# Altium PCB ADTPCB.PcbDoc (part 1 of 2)
Units mil, origin at the board's own origin, x right, y up, seen from the top; angles counter-clockwise.
Board outline 2950 x 1935 mil, 2 copper layers (Top Layer, Bottom Layer); 87 components, 120 nets, 430 pads, 109 vias.
Unrouted connection lines stored in the file: 3.
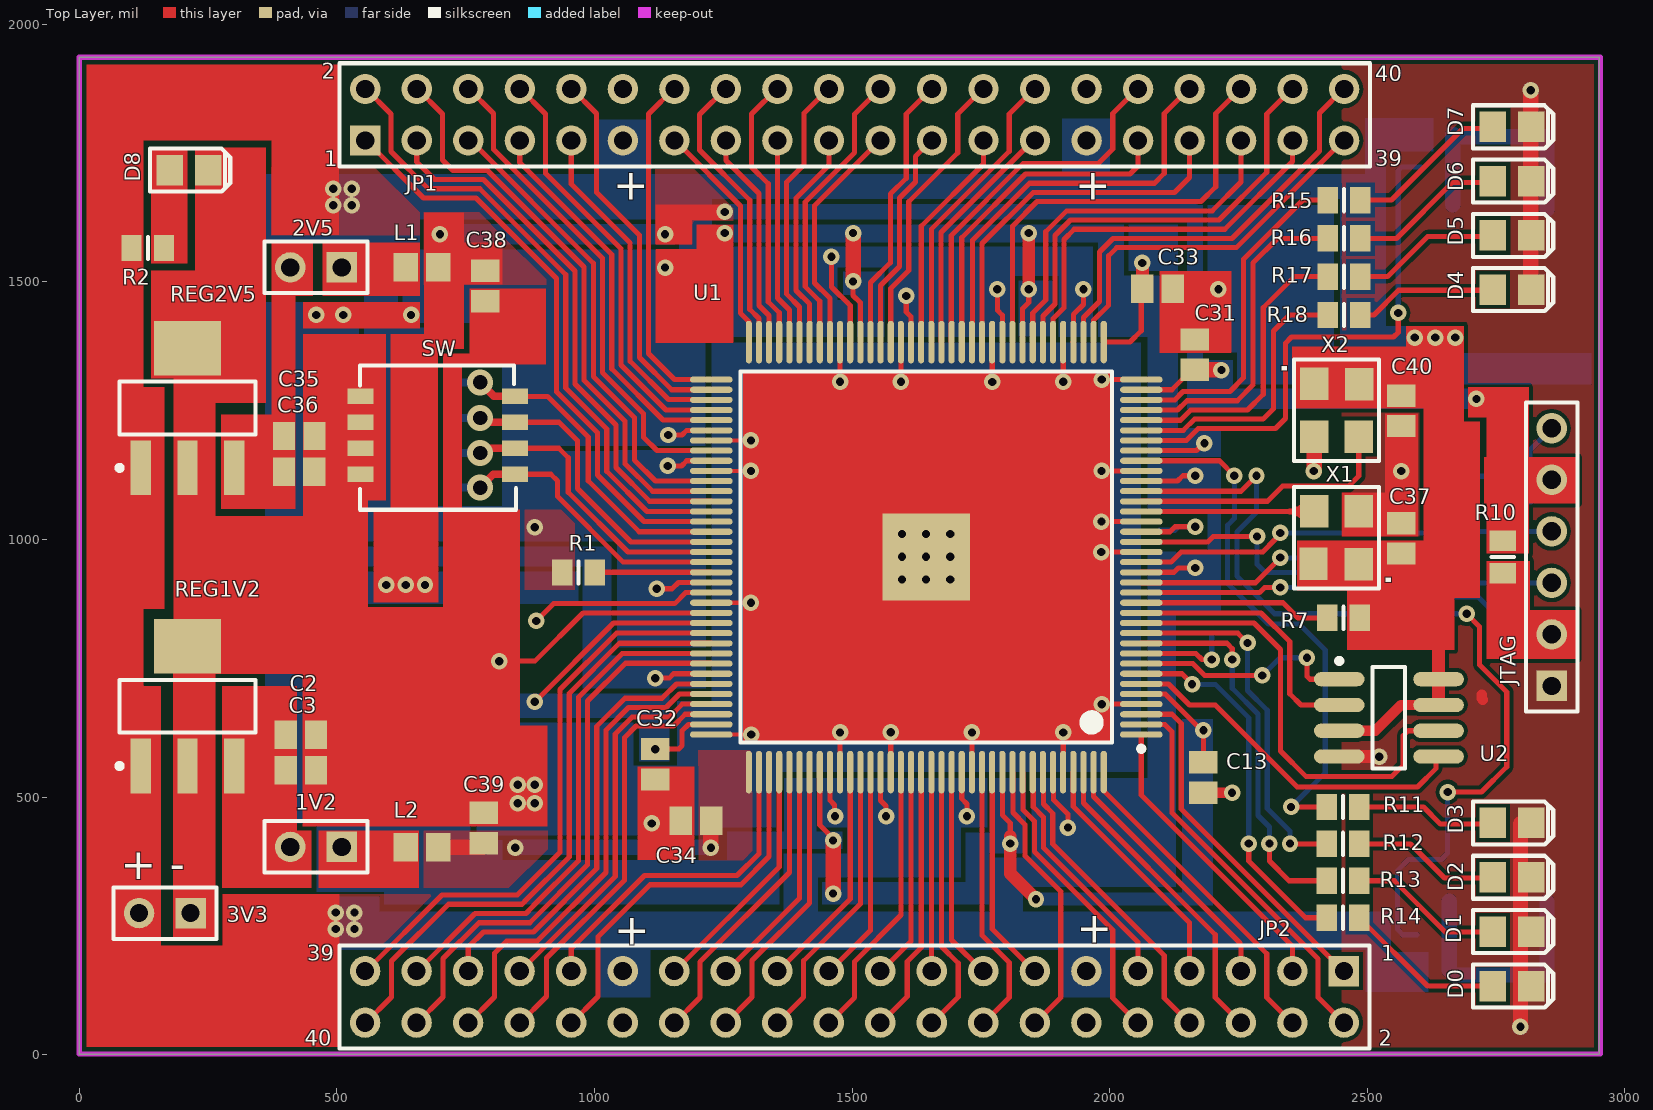
[diagram p0: Top Layer view]
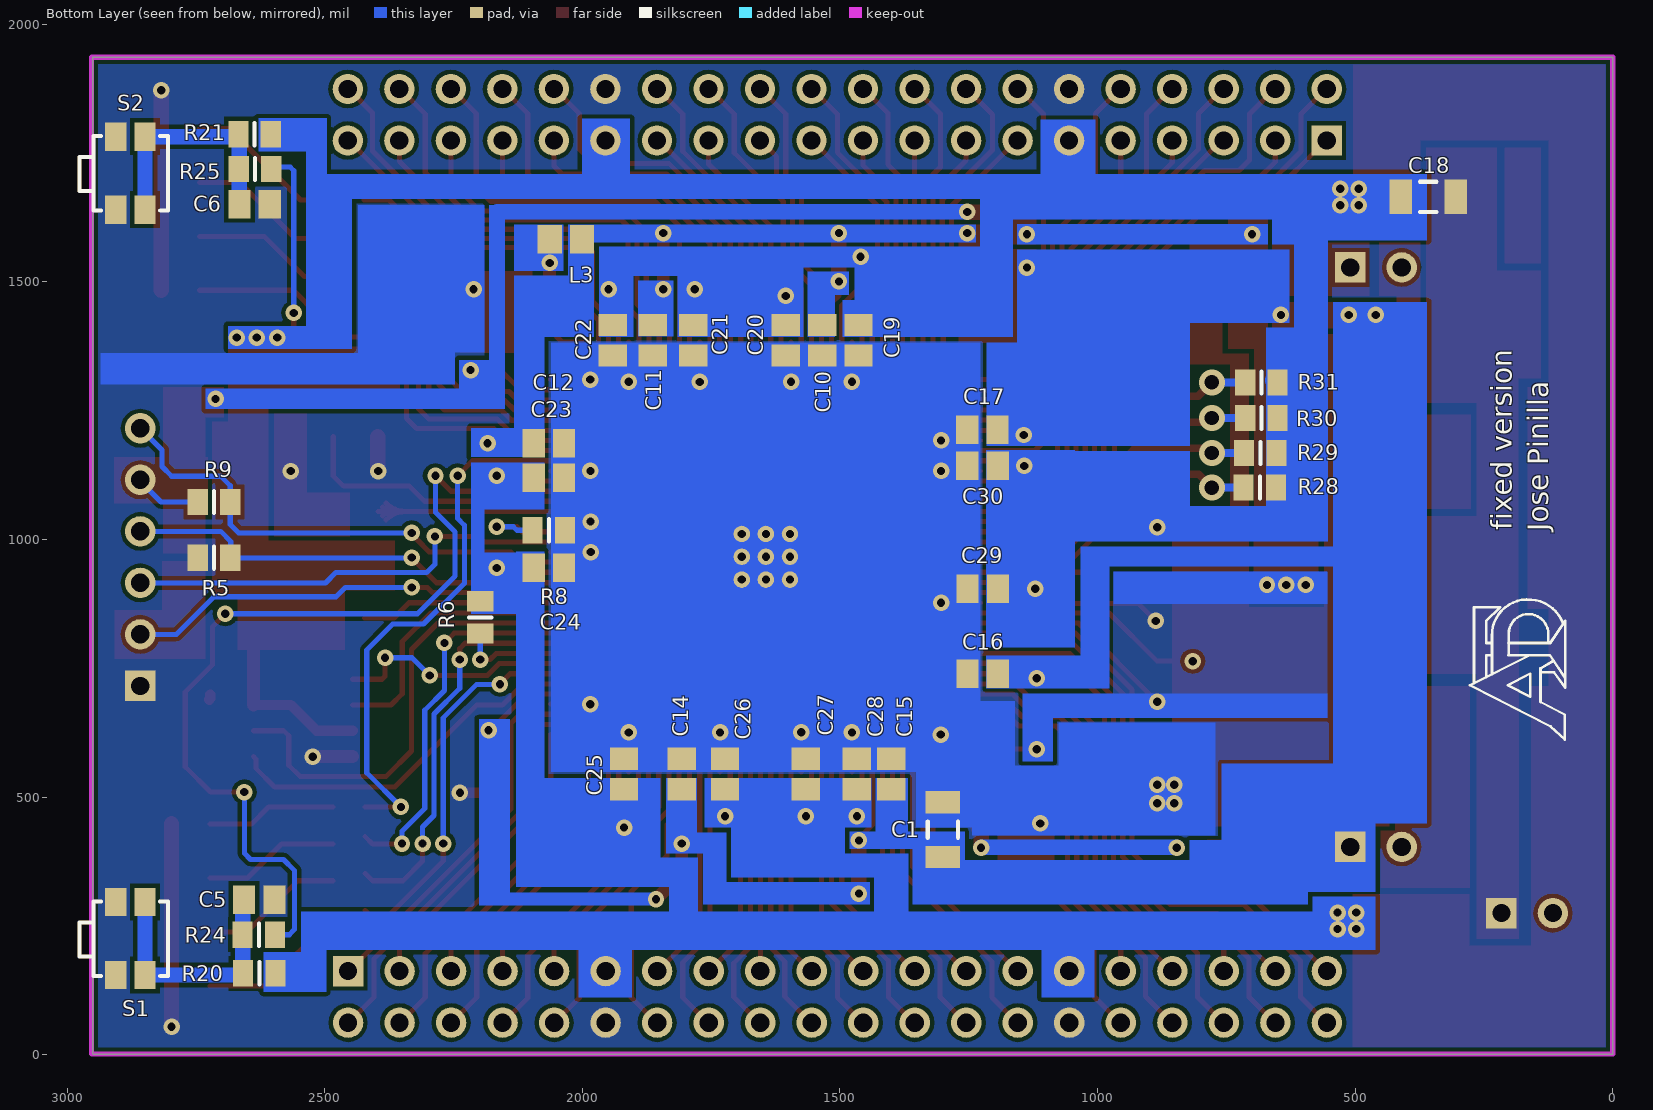
[diagram p1: Bottom Layer view, seen from below]

## Layer stack, top to bottom
Top Solder: solder mask 0.4, Solder Resist, Dk 3.5
Top Layer: signal copper 1.4
Dielectric1: core 12.6, FR-4, Dk 4.8
Bottom Layer: signal copper 1.4
Bottom Solder: solder mask 0.4, Solder Resist, Dk 3.5

## Board outline
0,0.91 0,1935.91 2950,1935.91 2950,0.91

## Design rules (kind name [scope] priority, off if disabled: settings)
Clearance [All] p1: gap=7.87 ignorepadtopadclearanceinfootprint=FALSE except(0: Arc-Hole Track-Hole SMDPad-Hole THPad-Hole Via-Hole Fill-Hole Poly-Hole Region-Hole Text-Hole)
ComponentClearance [All] p1: gap=0 collisioncheckmode=3 verticalgap=10 showdistances=FALSE
FabricationTestPointUsage TestPointUsage [All] p1: valid=0 allowmultiple=FALSE
FabricationTestpoint Testpoint [All] p1: side=3 testpointundercomponent=TRUE minsize=40 maxsize=100 preferedsize=60 minholesize=0 maxholesize=40 preferedholesize=32 testpointgrid=1 allowsidetop=TRUE allowsidebottom=TRUE usegrid=TRUE gridtolerance=0.01
PlaneConnect [All] p1: planeconnectstyle=Direct reliefexpansion=20 reliefentries=4 reliefconductorwidth=10 reliefairgap=10
PolygonConnect [All] p1: connectstyle=Direct reliefconductorwidth=10 reliefentries=4 polygonreliefangle="90 Angle" airgapwidth=10
RoutingVias [All] p1: holewidth=28 width=50 viastyle="Through Hole" minholewidth=16 minwidth=32 maxholewidth=28 maxwidth=50
SilkToSilkClearance [All] p1: silktosilkclearance=0
SilkToSolderMaskClearance SilkscreenOverComponentPads [IsPad] p1: minsilkscreentomaskgap=0 clearancetoexposedcopper=TRUE
SolderMaskExpansion [All] p1: expansion=4 istentingtop=FALSE
Width [All] p1: maxlimit=100 minlimit=7.87 preferedwidth=10 minimp=50.000000 maximp=50.000000 favimp=50.000000
24 further rules are at their usual default settings.

## Components (designator, comment, footprint, x,y, rotation, side; value= is the part's Value field where it differs from the comment)
1V2 "1V2" HDR1X2 509.53,403.31 r180 top
2V5 "2V5" HDR1X2 509.53,1528.23 r180 top
3V3 "VCC3P3" HDR1X2 216,274.91 r180 top
C1 "Cap" C1206 1300,436.91 r270 bottom
C2 "Cap" C0805 430,620.91 r180 top
C3 "Cap" C0805 430,551.91 r180 top
C5 "Cap" C0805 2627,300.91 r0 bottom
C6 "Cap" C0805 2636,1650.91 r0 bottom
C10 "Cap" C0805 1534.5,1386.91 r90 bottom
C11 "Cap" C0805 1863,1386.91 r90 bottom
C12 "Cap" C0805 2065,1186.91 r0 bottom
C13 "Cap" C0805 2182,537.91 r90 top
C14 "Cap" C0805 1807,544.91 r270 bottom
C15 "Cap" C0805 1400,544.91 r270 bottom
C16 "Cap" C0805 1223,739.53 r180 bottom
C17 "Cap" C0805 1223.6,1213.21 r180 bottom
C18 "Cap" C1206 358,1664.91 r0 bottom
C19 "Cap" C0805 1464,1386.91 r90 bottom
C20 "Cap" C0805 1605,1386.91 r90 bottom
C21 "Cap" C0805 1785,1386.91 r90 bottom
C22 "Cap" C0805 1941,1386.91 r90 bottom
C23 "Cap" C0805 2065,1119.91 r0 bottom
C24 "Cap" C0805 2065,944.91 r0 bottom
C25 "Cap" C0805 1919,544.91 r270 bottom
C26 "Cap" C0805 1723,544.91 r270 bottom
C27 "Cap" C0805 1566,544.91 r270 bottom
C28 "Cap" C0805 1467,544.91 r270 bottom
C29 "Cap" C0805 1222.7,904.61 r180 bottom
C30 "Cap" C0805 1223.28,1143.21 r180 bottom
C31 "Cap" C0805 2165,1358.91 r270 top
C32 "Cap" C0805 1118,563.91 r90 top
C33 "Cap" C0805 2093.02,1486.91 r180 top
C34 "Cap" C0805 1197,453.91 r0 top
C35 "Cap" C0805 427,1200.91 r180 top
C36 "Cap" C0805 426.73,1131.59 r180 top
C37 "Cap" C0805 2566,1002.24 r270 top
C38 "Cap" C0805 788,1491.91 r90 top
C39 "Cap" C0805 785,439.91 r270 top
C40 "Cap" C0805 2566,1249.86 r90 top
D0 "LED2" CD2012-0805 2781,132.91 r0 top
D1 "LED2" CD2012-0805 2781,238.57 r0 top
D2 "LED2" CD2012-0805 2781,344.24 r0 top
D3 "LED2" CD2012-0805 2781,449.91 r0 top
D4 "LED2" CD2012-0805 2781,1484.91 r0 top
D5 "LED2" CD2012-0805 2781,1590.24 r0 top
D6 "LED2" CD2012-0805 2781,1695.57 r0 top
D7 "LED2" CD2012-0805 2781,1800.91 r0 top
D8 "LED2" CD2012-0805 213,1716.91 r0 top
JP1 "*" HDR2X20 555.12,1774.48 r0 top
JP2 "*" HDR2X20 2454.72,162.28 r180 top
JTAG "*" HDR1X6 2858,715.91 r90 top
L1 "Ferrite Bead" 2029 665,1528.23 r0 top
L2 "Ferrite Bead" 2029 665,402.91 r0 top
L3 "Ferrite Bead" 2029 2032,1582.91 r0 bottom
R1 "Res Semi" 6-0805_L 969,935.91 r0 top
R2 "Res Semi" 6-0805_L 133,1565.91 r0 top
R5 "Res Semi" 6-0805_L 2715,964.91 r0 bottom
R6 "Res Semi" 6-0805_L 2198,848.91 r270 bottom
R7 "Res Semi" 6-0805_L 2454,847.91 r180 top
R8 "Res Semi" 6-0805_L 2065,1017.91 r0 bottom
R9 "Res Semi" 6-0805_L 2715,1072.91 r180 bottom
R10 "Res Semi" 6-0805_L 2763,965.91 r270 top
R11 "Res Semi" 6-0805_L 2453,480.91 r0 top
R12 "Res Semi" 6-0805_L 2453,409.24 r0 top
R13 "Res Semi" 6-0805_L 2453,337.57 r0 top
R14 "Res Semi" 6-0805_L 2453,265.91 r0 top
R15 "Res Semi" 6-0805_L 2455,1658.91 r0 top
R16 "Res Semi" 6-0805_L 2455,1584.57 r0 top
R17 "Res Semi" 6-0805_L 2455,1510.24 r0 top
R18 "Res Semi" 6-0805_L 2455,1435.91 r0 top
R20 "Res Semi" 6-0805_L 2627,157.91 r0 bottom
R21 "Res Semi" 6-0805_L 2636,1786.91 r0 bottom
R24 "Res Semi" 6-0805_L 2628,232.91 r0 bottom
R25 "Res Semi" 6-0805_L 2635.5,1719.21 r0 bottom
R28 "Res Semi" 6-0805_L 685,1100.91 r0 bottom
R29 "Res Semi" 6-0805_L 684,1167.91 r0 bottom
R30 "Res Semi" 6-0805_L 682,1235.91 r0 bottom
R31 "Res Semi" 6-0805_L 682,1304.91 r0 bottom
REG1V2 "RT9183-12GG" SOT223_M 210,676.54 r90 top
REG2V5 "MCP1824ST-2502E" SOT223_M 210,1255.28 r90 top
S1 "SW-PB" EVQ-P7C01K 2900,253.17 r0 bottom
S2 "SW-PB" EVQ-P7C01K 2900,1738.76 r0 bottom
SW "DIP" DIP 645,1153.91 r90 top
U1 "EP4CE6E144" EQFP144_M 1644,965.91 r180 top
U2 "*" SO8_M 2542,653.91 r0 top
X1 "OSCILLATORSMD" "OSCILLATOR SMD" 2440.16,1003.31 r90 top
X2 "OSCILLATORSMD" "OSCILLATOR SMD" 2440.16,1250.92 r270 top

## Footprints (in the part's own frame and the unit in brackets; to place one, negate y for a bottom-side part, rotate by r counter-clockwise, add the part's x,y. Pads: shape width x height; smd on the part's side, far side on the other; paste and mask are expansions set on the pad)
6-0805_L [mm] "Chip Resistor, Body 2.0x1.2mm, IPC High Density"
  rect 1x1.3 smd: 1(-0.8,0) 2(0.8,0)
  silkscreen extent 0,-0.55 0,0.55, body extent -1.07,-0.7 1.07,0.7, height 0.7
2029 [mm] "Chip Inductor, Body 2.0x1.2mm, IPC High Density"
  rect 1.2x1.4 smd: 1(-0.8,0) 2(0.8,0)
  body extent -1.1,-0.7 1.1,0.7, height 0.55
C0805 [mm] "Chip Capacitor, Body 2.0x1.3mm, IPC High Density"
  rect 1.1x1.4 smd: 1(-0.75,0) 2(0.75,0)
  body extent -1.1,-0.72 1.1,0.72, height 1.4
C1206 [mm] "Chip Capacitor, Body 3.2x1.6mm, IPC High Density"
  rect 1.1x1.7 smd: 1(-1.35,0) 2(1.35,0)
  silkscreen extent -0.4,-0.75 0.4,0.75, body extent -1.7,-0.9 1.7,0.9, height 1.3
CD2012-0805 [mm] "Chip Inductor; Body 2.0 x 1.2 mm (LxW typ)"
  rect 1.3x1.5 smd: 1(-0.95,0) 2(0.95,0)
  silkscreen extent -1.92,-1.05 2.03,1.07
DIP [mm]
  rect 0.762x1.27 smd: 1(-0.69,2.52) 2(0.59,2.52) 3(1.87,2.52) 4(3.15,2.52) 5(-0.69,-5.1) 6(0.59,-5.1) 7(1.87,-5.1) 8(3.15,-5.1)
  silkscreen extent -2.44,-5.15 4.67,2.55, body extent -2.54,-5.25 4.77,2.65, height 2.7
EQFP144_M [mm] "Thin QFP, 144-Leads, Body 20x20mm, Pitch 0.5mm, IPC Low Density"
  oval 2.1x0.3 smd: 1(-10.6,8.75) 2(-10.6,8.25) 3(-10.6,7.75) 4(-10.6,7.25) 5(-10.6,6.75) 6(-10.6,6.25) 7(-10.6,5.75) 8(-10.6,5.25) 9(-10.6,4.75) 10(-10.6,4.25) 11(-10.6,3.75) 12(-10.6,3.25) 13(-10.6,2.75) 14(-10.6,2.25) 15(-10.6,1.75) 16(-10.6,1.25) 17(-10.6,0.75) 18(-10.6,0.25) 19(-10.6,-0.25) 20(-10.6,-0.75) 21(-10.6,-1.25) 22(-10.6,-1.75) 23(-10.6,-2.25) 24(-10.6,-2.75) 25(-10.6,-3.25) 26(-10.6,-3.75) 27(-10.6,-4.25) 28(-10.6,-4.75) 29(-10.6,-5.25) 30(-10.6,-5.75) 31(-10.6,-6.25) 32(-10.6,-6.75) 33(-10.6,-7.25) 34(-10.6,-7.75) 35(-10.6,-8.25) 36(-10.6,-8.75) 73(10.6,-8.75) 74(10.6,-8.25) 75(10.6,-7.75) 76(10.6,-7.25) 77(10.6,-6.75) 78(10.6,-6.25) 79(10.6,-5.75) 80(10.6,-5.25) 81(10.6,-4.75) 82(10.6,-4.25) 83(10.6,-3.75) 84(10.6,-3.25) 85(10.6,-2.75) 86(10.6,-2.25) 87(10.6,-1.75) 88(10.6,-1.25) 89(10.6,-0.75) 90(10.6,-0.25) 91(10.6,0.25) 92(10.6,0.75) 93(10.6,1.25) 94(10.6,1.75) 95(10.6,2.25) 96(10.6,2.75) 97(10.6,3.25) 98(10.6,3.75) 99(10.6,4.25) 100(10.6,4.75) 101(10.6,5.25) 102(10.6,5.75) 103(10.6,6.25) 104(10.6,6.75) 105(10.6,7.25) 106(10.6,7.75) 107(10.6,8.25) 108(10.6,8.75)
  oval 0.3x2.1 smd: 37(-8.75,-10.6) 38(-8.25,-10.6) 39(-7.75,-10.6) 40(-7.25,-10.6) 41(-6.75,-10.6) 42(-6.25,-10.6) 43(-5.75,-10.6) 44(-5.25,-10.6) 45(-4.75,-10.6) 46(-4.25,-10.6) 47(-3.75,-10.6) 48(-3.25,-10.6) 49(-2.75,-10.6) 50(-2.25,-10.6) 51(-1.75,-10.6) 52(-1.25,-10.6) 53(-0.75,-10.6) 54(-0.25,-10.6) 55(0.25,-10.6) 56(0.75,-10.6) 57(1.25,-10.6) 58(1.75,-10.6) 59(2.25,-10.6) 60(2.75,-10.6) 61(3.25,-10.6) 62(3.75,-10.6) 63(4.25,-10.6) 64(4.75,-10.6) 65(5.25,-10.6) 66(5.75,-10.6) 67(6.25,-10.6) 68(6.75,-10.6) 69(7.25,-10.6) 70(7.75,-10.6) 71(8.25,-10.6) 72(8.75,-10.6) 109(8.75,10.6) 110(8.25,10.6) 111(7.75,10.6) 112(7.25,10.6) 113(6.75,10.6) 114(6.25,10.6) 115(5.75,10.6) 116(5.25,10.6) 117(4.75,10.6) 118(4.25,10.6) 119(3.75,10.6) 120(3.25,10.6) 121(2.75,10.6) 122(2.25,10.6) 123(1.75,10.6) 124(1.25,10.6) 125(0.75,10.6) 126(0.25,10.6) 127(-0.25,10.6) 128(-0.75,10.6) 129(-1.25,10.6) 130(-1.75,10.6) 131(-2.25,10.6) 132(-2.75,10.6) 133(-3.25,10.6) 134(-3.75,10.6) 135(-4.25,10.6) 136(-4.75,10.6) 137(-5.25,10.6) 138(-5.75,10.6) 139(-6.25,10.6) 140(-6.75,10.6) 141(-7.25,10.6) 142(-7.75,10.6) 143(-8.25,10.6) 144(-8.75,10.6)
  rect 4.3x4.3 smd: 145(0,0)
  silkscreen extent -10.73,-9.15 9.15,9.57, body extent -10,-10 10,10, height 1.6
EVQ-P7C01K [mm]
  rect 1.05x1.4 smd: 1(-1.3,-1.1) 1(-1.3,2.5) 2(0.15,-1.1) 2(0.15,2.5)
  silkscreen extent -2.44,-1.13 1.94,2.55, body extent -2.54,-1.22 1.94,2.64, height 1.2
HDR1X2 [mm] "Connector; Header; 2 Position"
  rect 1.5x1.5 hole 0.9: 1(0,0)
  round 1.5 hole 0.9: 2(2.54,0)
  silkscreen extent -1.27,-1.27 3.81,1.27
HDR1X6 [mm] "Connector; Header; 6 Position"
  rect 1.5x1.5 hole 0.9: 1(0,0)
  round 1.5 hole 0.9: 2(2.54,0) 3(5.08,0) 4(7.62,0) 5(10.16,0) 6(12.7,0)
  silkscreen extent -1.27,-1.27 13.97,1.27
HDR2X20 [mm] "Connector; Header; 20x2 Position"
  rect 1.5x1.5 hole 0.9: 1(0,0)
  round 1.5 hole 0.9: 2(0,2.54) 3(2.54,0) 4(2.54,2.54) 5(5.08,0) 6(5.08,2.54) 7(7.62,0) 8(7.62,2.54) 9(10.16,0) 10(10.16,2.54) 11(12.7,0) 12(12.7,2.54) 13(15.24,0) 14(15.24,2.54) 15(17.78,0) 16(17.78,2.54) 17(20.32,0) 18(20.32,2.54) 19(22.86,0) 20(22.86,2.54) 21(25.4,0) 22(25.4,2.54) 23(27.94,0) 24(27.94,2.54) 25(30.48,0) 26(30.48,2.54) 27(33.02,0) 28(33.02,2.54) 29(35.56,0) 30(35.56,2.54) 31(38.1,0) 32(38.1,2.54) 33(40.64,0) 34(40.64,2.54) 35(43.18,0) 36(43.18,2.54) 37(45.72,0) 38(45.72,2.54) 39(48.26,0) 40(48.26,2.54)
  silkscreen extent -1.27,-1.27 49.53,3.81
"OSCILLATOR SMD" [mm]
  rect 1.6x1.4 smd: 1(-1.3,-1.1) 2(1.3,-1.1) 3(1.3,1.1) 4(-1.273,1.129)
  silkscreen extent -2.5,-2.1 2.5,2.1, body extent -2.5,-2.1 2.5,2.1, height 1
SO8_M [mm] "SOIC, 8-Leads, Body 4.9x3.9mm, Pitch 1.27mm, IPC Low Density"
  oval 2.5x0.7 smd: 1(-2.45,1.905) 2(-2.45,0.635) 3(-2.45,-0.635) 4(-2.45,-1.905) 5(2.45,-1.905) 6(2.45,-0.635) 7(2.45,0.635) 8(2.45,1.905)
  silkscreen extent -2.57,-2.5 0.8,2.93, body extent -2,-2.5 2,2.5, height 1.75
SOT223_M [mm] "SOT223, 4-Leads, Body 6.5x3.5mm, Pitch 2.3mm, Lead Span 7mm, IPC Low Density"
  rect 2.7x1 smd: 1(-2.95,2.3) 2(-2.95,0) 3(-2.95,-2.3)
  rect 2.7x3.3 smd: 4(2.95,0)
  silkscreen extent -3.07,-3.35 1.3,3.47, body extent -1.85,-3.35 1.85,3.35, height 1.7

## Part data
1V2 2V5 3V3: library part JP1Q, "CONN HEADER 36POS .100 VERT TIN"
C1 C18: "CAP CER 100UF 6.3V Y5V 1206"
C2 C38 C39: "CAP CER 10UF 10V Y5V 0805"
C3 C10 C11 C12 C13 C14 C15 C16 C17 C19 C20 C21 C22 C23 C24 C25 C26 C27 C28 C29 C30 C31 C32 C33 C34 C36 C37 C40: "CAP CER 0.1UF 16V 10% X7R 0805"
C5 C6: "CAP CER 1UF 16V Y5V 0805"
C35: "CAP CER 0.47UF 16V 10% X7R 0805"
D0 D1 D2 D3 D4 D5 D6 D7 D8: "LED GREEN CLEAR THIN 0805 SMD"
JP1 JP2: library part JP20Q, "CONN HEADER 36POS .100 VERT TIN"
JTAG: library part JP3Q, "CONN HEADER 36POS .100 VERT TIN"
L1 L2 L3: library part Inductor, "FERRITE CHIP BEAD 600 OHM SMD"
R1 R6 R7 R8 R9 R10 R28 R29 R30 R31: "RES 10K OHM 1/8W 5% 0805 SMD"
R2 R11 R12 R13 R14 R15 R16 R17 R18: "RES 220 OHM 1/8W 5% 0805 SMD"
R5: "RES 1.0K OHM 1/8W 5% 0805 SMD"
R20 R21: "RES 100K OHM 1/8W 5% 0805 SMD"
R24 R25: "RES 2K OHM 1/8W 5% 0805 SMD"
REG1V2: "IC REG LDO 1.2V 1.5A SOT223"
REG2V5: library part RT9183-12GG, "IC REG LDO 2.5V .3A SOT223-3"
S1 S2: "SWITCH TACTILE SPST-NO 0.05A 12V"
SW: "SWITCH DIP HALF PITCH 4POS"
U2: library part M25P16, "IC FLASH 16MBIT 75MHZ 8SOIC"
X1 X2: "OSCILLATOR 50.00MHZ SMD"

## Free pads (board coordinates)
  round 32 hole 16: 0(1596.95,1010.83) 1(1643.7,1010.83) 2(1690.45,1010.83) 3(1690.45,966.54) 4(1643.7,966.54) 5(1596.95,966.54) 6(1596.95,922.24) 7(1643.7,922.24) 8(1690.45,922.24)

## Via types
v1: diameter 32, hole 16, Top Layer to Bottom Layer, 105 vias
v2: diameter 50, hole 28, Top Layer to Bottom Layer, 4 vias

## Nets (pads, with @x,y where several pads share a name; then routed paths per layer and width w, separated by ;. In a path a pad name is that pad's centre, name@x,y a point inside that pad or via, vN(x,y) a via of type N, cw(c..) or ccw(c..) an arc to the next point about the centre after c; other vN are vias at no path point)
ASDO: U1.6 U2.5 | length 695.2
  Top Layer w10: U1.6@2061.32,719.84 2114.06,719.84 2155,678.91 2204.95,678.91 2364.17,519.68 2597.44,519.68 2633.74,555.98 2633.74,574.19 U2.5@2638.46,578.91
CLK2: U1.24 X2.3 | length 518.9
  Top Layer w10: U1.24@2061.32,1074.17 2306.27,1074.17 2335.87,1103.78 2463.87,1103.78 2483.46,1123.37 X2.3@2483.46,1199.74
CLK3: R24.1 U1.25 | length 1773.9
  Top Layer w10: U1.25@2061.32,1093.86 2254.95,1093.86 v1(2285,1123.91) ; v1(2656,509.91) 2722,509.91 2770.87,558.78 2770.87,704.03 2718,756.91 2718,830.91 v1(2693,855.91)
  Bottom Layer w10: v1(2285,1123.91) 2285,1052.91 2247,1014.91 2247,928.91 2320,855.91 v1(2693,855.91) ; R24.1@2596.5,232.91 2569,232.91 2559,242.91 2559,357.91 2580,378.91 2644,378.91 2656,390.91 v1(2656,509.91)
CLK4: R28.2 SW.5 U1.91 | length 639.2
  Top Layer w10: 815.79,1126.74 915.17,1126.74 928,1113.91 928,1083.91 1055.84,956.06 U1.91@1226.68,956.06
  Top Layer w15: v2(778,1100.91) 803.83,1126.74 SW.5@845.79,1126.74
  Bottom Layer w15: R28.2@716.5,1100.91 v2(778,1100.91)
CLK5: R29.2 SW.6 U1.90 | length 667.7
  Top Layer w10: 815.79,1177.13 930.77,1177.13 949,1158.91 949,1091.91 1065.16,975.75 U1.90@1226.68,975.75
  Top Layer w15: v2(778,1167.91) 787.23,1177.13 SW.6@845.79,1177.13
  Bottom Layer w15: R29.2@715.5,1167.91 v2(778,1167.91)
CLK6: R30.2 SW.7 U1.89 | length 697.1
  Top Layer w10: 815.79,1227.53 931.38,1227.53 967,1191.91 967,1099.18 1070.75,995.43 U1.89@1226.68,995.43
  Top Layer w15: v2(778,1235.91) 786.38,1227.53 SW.7@845.79,1227.53
  Bottom Layer w15: R30.2@713.5,1235.91 v2(778,1235.91)
CLK7: R31.2 SW.8 U1.88 | length 713
  Top Layer w10: 815.79,1277.92 908.98,1277.92 988,1198.91 988,1113.91 1086.79,1015.12 U1.88@1226.68,1015.12
  Top Layer w15: v2(778,1304.91) 804.98,1277.92 SW.8@845.79,1277.92
  Bottom Layer w15: R31.2@713.5,1304.91 v2(778,1304.91)
CLK_50M: U1.23 X1.3 | length 468.7
  Top Layer w10: U1.23@2061.32,1054.49 X1.3@2396.85,1054.49 ; X1.3@2380.9,1038.54 ccw(c2342.39,1000.03) 2342.39,1054.49 ccw(c2342.39,1108.95) X1.3@2380.9,1070.44 ; X1.3@2387.97,1045.61 ccw(c2366.53,1024.17) 2366.53,1054.49 ccw(c2366.53,1084.81) X1.3@2387.97,1063.37
CONF_DONE: R1.2 U1.92 | length 226.2
  Top Layer w10: R1.2@1000.5,936.38 U1.92@1226.68,936.38
DATA0: U1.13 U2.2 | length 517.7
  Top Layer w10: U1.13@2061.32,857.64 2293.92,857.65 2349.41,802.17 2349.41,700.79 2371.29,678.91 U2.2@2445.54,678.91
DCLK: U1.12 U2.6 | length 885.9
  Top Layer w10: U1.12@2061.32,837.95 2280.16,837.95 2331.54,786.58 2331.54,589.61 2380.79,540.35 2548.23,540.35 2569.88,562.01 2569.88,619.09 2579.69,628.91 U2.6@2638.46,628.91
GND: 3V3.1 C1.1 C2.1 C3.1 C5.1 C6.1 C10.1 C11.1 C12.1 C13.1 C14.1 C15.1 C16.1 C17.1 C18.1 C19.1 C20.1 C21.1 C22.1 C23.1 C24.1 C25.1 C26.1 C27.1 C28.1 C29.1 C30.1 C31.1 C32.1 C33.1 C34.1 C35.1 C36.1 C37.1 C38.1 C39.1 C40.1 D0.2 D1.2 D2.2 D3.2 D4.2 D5.2 D6.2 D7.2 D8.2 JP1.12 JP1.30 JP2.12 JP2.30 JTAG.1 pad.0 pad.1 pad.2 pad.3 pad.4 pad.5 pad.6 pad.7 pad.8 R5.2 R8.1 REG1V2.2 REG1V2.4 REG2V5.2 REG2V5.4 S1.2 S2.2 SW.1 SW.2 SW.3 SW.4 U1.4 U1.19 U1.22 U1.27 U1.36 U1.41 U1.48 U1.57 U1.63 U1.79 U1.82 U1.95 U1.96 U1.108 U1.118 U1.123 U1.131 U1.140 U1.145 U2.4 X1.2 X2.2 | length 2974.3
  Top Layer w7.87: U1.108@1226.68,621.42 v1(1304.49,621.42) ; U1.95@1226.68,877.32 v1(1303.58,877.32) ; U1.82@1226.68,1133.23 v1(1303.68,1133.23) ; U1.79@1226.68,1192.28 v1(1303.62,1192.28)
  Top Layer w10: v1(815,763.91) 884,763.91 977.73,857.64 U1.96@1226.68,857.64 ; U1.118@1476.68,548.58 v1(1476.68,625.58) ; v1(1476.68,1306.23) U1.63@1476.68,1383.23 ; U1.123@1575.1,548.58 v1(1575.1,626.01) ; v1(1594.79,1306.12) U1.57@1594.79,1383.23 ; U1.131@1732.58,548.58 v1(1732.58,625.49) ; v1(1771.95,1305.95) U1.48@1771.95,1383.23 ; U1.140@1909.75,548.58 v1(1909.75,625.65) ; v1(1909.75,1306.16) U1.41@1909.75,1383.23 ; v1(1983.84,975.75) U1.19@2061.32,975.75 ; v1(1983.9,1034.8) U1.22@2061.32,1034.8 ; v1(1984.32,1133.23) U1.27@2061.32,1133.23 ; v1(1984.49,1310.39) U1.36@2061.32,1310.39 ; v1(1984.57,680.47) U1.4@2061.32,680.47 ; v1@2522.47,578.91 v1(2523.23,578.15)
  Top Layer w20: C13.1@2182,508.38 v1(2237.53,508.38) ; 2722.11,698.79 2722.11,691.27 2724.41,688.98
  Top Layer w25: U2.4@2445.54,578.91 v1@2522.47,578.91
  Top Layer w30: v1@2396.85,1133.76 X2.2@2396.85,1199.74 ; v1(2797.4,54.31) 2797.4,238.43 D3.2@2797.4,448.05 ; D4.2@2817.4,1483.76 v1(2817.4,1872.31)
  Top Layer w40: C3.1@459.53,551.91 C2.1@459.53,620.91 ; SW.1@545.79,1126.74 SW.2@545.79,1177.13 SW.3@545.79,1227.53 SW.4@545.79,1277.92
  other v1: 1111,448.91 851,487.91 884,487.91 851,523.91 884,523.91 2396,1132.91 2566,1132.91 2211,1485.91
IO1: JP2.3 U1.1 | length 582.2
  Top Layer w10: U1.1@2061.32,621.42 2061.32,504.03 2355,210.35 JP2.3@2355,160.91
IO2: JP2.2 U1.2 | length 769.9
  Top Layer w10: U1.2@2061.32,641.1 2106.8,641.1 2121,626.91 2121,469.63 2404.68,185.94 2404.68,111.22 JP2.2@2455,60.91
IO3: JP2.1 U1.3 | length 698
  Top Layer w10: U1.3@2061.32,660.79 2121.12,660.79 2138.87,643.03 2138.87,477.03 JP2.1@2455,160.91
IO7: R14.1 U1.7 | length 716.1
  Top Layer w10: U1.7@2061.32,739.53 2140.38,739.53 v1@2154,725.91 ; v1(2270,409.91) 2270,375.91 2380,265.91 2407.5,265.91 R14.1@2421.5,279.91
  Bottom Layer w10: v1(2160,718.91) 2205,718.91 2270,653.91 v1(2270,409.91)
IO10: R13.1 U1.10 | length 756.2
  Top Layer w10: U1.10@2061.32,798.58 2227.45,798.58 2238,788.03 v1(2238,766.91) ; v1(2310,409.91) 2310,375.91 2348.33,337.57 2407.5,337.57 R13.1@2421.5,351.57
  Bottom Layer w10: v1(2238,766.91) 2238,711.18 2287.87,661.31 2287.87,464.09 2310,441.97 v1(2310,409.91)
IO11: R12.1 U1.11 | length 715.3
  Top Layer w10: U1.11@2061.32,818.27 2248.66,818.27 v1(2267.72,799.21) ; v1@2350,409.24 2407.5,409.24 R12.1@2421.5,423.24
  Bottom Layer w10: v1(2267.72,799.21) 2267.39,798.88 2267.39,707.07 2305.75,668.71 2305.75,478.16 2350,433.91 v1(2350,409.91)
IO28: R11.1 U1.28 | length 1051.6
  Top Layer w10: U1.28@2061.32,1152.91 2212.99,1152.91 v1(2242,1123.91) ; v1(2352,480.91) R11.1@2421.5,480.91
  Bottom Layer w10: v1(2242,1123.91) 2242,1040.91 2229,1027.91 2229,914.91 2308,835.91 2368,835.91 2418.31,785.6 2418.31,547.21 v1(2352,480.91)
IO30: R25.1 U1.30 | length 1032.9
  Top Layer w10: U1.30@2061.32,1192.28 2148.54,1192.28 2172.04,1215.78 2321.87,1215.78 2341,1234.91 2341,1380.91 2353,1392.91 2551,1392.91 2560,1401.91 v1@2560,1440.91
  Bottom Layer w10: v1(2560,1439.91) 2560,1715.91 2566.87,1722.78 R25.1@2604,1722.78
IO31: R18.1 U1.31 | length 543.4
  Top Layer w10: U1.31@2061.32,1211.97 2142.95,1211.97 2164.64,1233.65 2297.75,1233.65 2318,1253.91 2318,1404.91 2349,1435.91 R18.1@2423.5,1435.91
IO32: R17.1 U1.32 | length 576
  Top Layer w10: U1.32@2061.32,1231.65 2137.36,1231.65 2157.23,1251.53 2267.62,1251.53 2298,1281.91 2298,1449.91 2358.33,1510.24 R17.1@2423.5,1510.24
IO33: R16.1 U1.33 | length 638.9
  Top Layer w10: U1.33@2061.32,1251.34 2131.77,1251.34 2149.83,1269.4 2247.5,1269.4 2277.87,1299.78 2277.87,1536.5 2325.94,1584.57 R16.1@2423.5,1584.57
IO34: R15.1 U1.34 | length 657.6
  Top Layer w10: U1.34@2061.32,1271.02 2126.17,1271.02 2142.43,1287.28 2233.37,1287.28 2260,1313.91 2260,1543.91 2375,1658.91 R15.1@2423.5,1658.91
IO38: JP1.39 U1.38 | length 730
  Top Layer w10: U1.38@1968.8,1383.23 1968.8,1425.53 1998,1454.73 1998,1550.91 2013.62,1566.53 2245.62,1566.53 JP1.39@2455,1775.91
IO39: JP1.40 U1.39 | length 837.7
  Top Layer w10: U1.39@1949.12,1383.23 1949.12,1431.13 1980.13,1462.14 1980.13,1558.31 2006.22,1584.4 2237.5,1584.4 2407,1753.91 2407,1827.91 JP1.40@2455,1875.91
IO42: JP1.37 U1.42 | length 756.3
  Top Layer w10: U1.42@1890.06,1383.23 1890.06,1428.41 1911.57,1449.92 1911.57,1582.47 1931.37,1602.28 2223.37,1602.28 2355,1733.91 JP1.37@2355,1775.91
IO43: JP1.38 U1.43 | length 862.3
  Top Layer w10: U1.43@1870.38,1383.23 1870.38,1434.01 1893.69,1457.32 1893.69,1589.88 1923.97,1620.15 2212.24,1620.15 2305,1712.91 2305,1825.91 JP1.38@2355,1875.91
IO44: JP1.35 U1.44 | length 725.7
  Top Layer w10: U1.44@1850.69,1383.23 1850.69,1439.6 1875.82,1464.72 1875.82,1597.28 1916.56,1638.02 2199.12,1638.02 2255,1693.91 JP1.35@2255,1775.91
IO46: JP1.36 U1.46 | length 862.7
  Top Layer w10: U1.46@1811.32,1383.23 1811.32,1608.23 1858.99,1655.9 2176.99,1655.9 2206,1684.91 2206,1826.91 JP1.36@2255,1875.91
IO49: JP1.33 U1.49 | length 720.2
  Top Layer w10: U1.49@1752.27,1383.23 1752.27,1574.45 1851.59,1673.77 2125.87,1673.77 2155,1702.91 JP1.33@2155,1775.91
IO50: JP1.34 U1.50 | length 809.7
  Top Layer w10: U1.50@1732.58,1383.23 1733.49,1384.13 1733.49,1580.95 1844.18,1691.65 2086.74,1691.65 2106,1710.91 2106,1826.91 JP1.34@2155,1875.91
IO51: JP1.31 U1.51 | length 664.8
  Top Layer w10: U1.51@1712.9,1383.23 1712.9,1585.64 1836.78,1709.52 2039.61,1709.52 2055,1724.91 2055,1775.91 JP1.31@2043.44,1775.91
IO52: JP1.32 U1.52 | length 728.9
  Top Layer w10: U1.52@1693.21,1383.23 1692.38,1384.06 1692.38,1590.39 1832.17,1730.19 1978.35,1730.19 2006,1757.84 2006,1826.91 JP1.32@2055,1875.91
IO53: JP1.27 U1.53 | length 482.4
  Top Layer w10: U1.53@1673.53,1383.23 1672.63,1384.13 1672.63,1595.92 1846.43,1769.72 1840.24,1775.91 JP1.27@1855,1775.91
IO54: JP1.28 U1.54 | length 576
  Top Layer w10: U1.54@1653.84,1383.23 1653.84,1602.41 1805,1753.57 1805,1825.91 JP1.28@1855,1875.91
IO55: JP1.25 U1.55 | length 442.7
  Top Layer w10: U1.55@1634.16,1383.23 1634.16,1608.01 1755,1728.85 JP1.25@1755,1775.91
IO58: JP1.26 U1.58 | length 567.2
  Top Layer w10: U1.58@1575.1,1383.23 1575.1,1487.45 1610,1522.35 1610,1655.8 1705,1750.8 1705,1825.91 JP1.26@1755,1875.91
IO59: JP1.23 U1.59 | length 433.9
  Top Layer w10: U1.59@1555.42,1383.23 1555.42,1493.05 1592.13,1529.75 1592.13,1663.21 1622.87,1693.95 1622.87,1743.78 JP1.23@1655,1775.91
IO60: JP1.24 U1.60 | length 542.1
  Top Layer w10: U1.60@1535.73,1383.23 1535.73,1498.64 1574.25,1537.16 1574.25,1670.61 1605,1701.36 1605,1825.91 JP1.24@1655,1875.91
IO64: JP1.21 U1.64 | length 458.1
  Top Layer w10: U1.64@1456.99,1383.23 1456.99,1468.13 1427,1498.13 1427,1647.91 JP1.21@1555,1775.91
IO65: JP1.22 U1.65 | length 564.9
  Top Layer w10: U1.65@1437.31,1383.23 1437.31,1462.54 1409,1490.85 1409,1655.18 1505,1751.18 1505,1825.91 JP1.22@1555,1875.91
IO66: JP1.19 U1.66 | length 430.1
  Top Layer w10: U1.66@1417.62,1383.23 1417.62,1456.95 1391.13,1483.45 1391.13,1662.59 1455,1726.46 JP1.19@1455,1775.91
IO67: JP1.20 U1.67 | length 537
  Top Layer w10: U1.67@1397.94,1383.23 1397.94,1451.36 1373,1476.29 1373,1693.91 1407,1727.91 1407,1827.91 JP1.20@1455,1875.91
IO68: JP1.17 U1.68 | length 402.3
  Top Layer w10: JP1.17@1355,1775.91 1355,1469.02 1378.25,1445.76 U1.68@1378.25,1383.23
IO69: JP1.18 U1.69 | length 535.6
  Top Layer w10: JP1.18@1355,1875.91 1305,1825.91 1305,1722.91 1337.13,1690.78 1337.13,1461.61 1358.57,1440.17 U1.69@1358.57,1383.23
IO70: JP1.15 U1.70 | length 427.4
  Top Layer w10: JP1.15@1255,1775.91 1255,1735.91 1319.25,1671.65 1319.25,1454.21 1338.88,1434.58 U1.70@1338.88,1383.23
IO71: JP1.16 U1.71 | length 561.5
  Top Layer w10: JP1.16@1255,1875.91 1204,1824.91 1204,1755.91 1301.38,1658.53 1301.38,1446.81 1319.2,1428.99 U1.71@1319.2,1383.23
IO72: JP1.13 U1.72 | length 458.1
  Top Layer w10: JP1.13@1162.38,1783.28 1160.87,1781.78 1160.87,1770.03 1283.5,1647.4 1283.5,1439.4 1299.51,1423.39 U1.72@1299.51,1383.23
IO73: JP1.14 U1.73 | length 678.3
  Top Layer w10: JP1.14@1155,1875.91 1105,1825.91 1105,1360.91 1155.51,1310.39 U1.73@1226.68,1310.39
IO74: JP1.10 U1.74 | length 742.7
  Top Layer w10: JP1.10@955,1875.91 1004,1826.91 1004,1673.91 1087.13,1590.78 1087.13,1353.5 1149.92,1290.71 U1.74@1226.68,1290.71
IO75: JP1.9 U1.75 | length 665.7
  Top Layer w10: JP1.9@955,1775.91 955,1689.91 1069.25,1575.65 1069.25,1346.1 1143.42,1271.93 1225.77,1271.93 U1.75@1226.68,1271.02
IO76: JP1.8 U1.76 | length 830
  Top Layer w10: JP1.8@855,1875.91 905,1825.91 905,1710.91 1051.38,1564.53 1051.38,1338.69 1138.73,1251.34 U1.76@1226.68,1251.34
IO77: JP1.7 U1.77 | length 753
  Top Layer w10: JP1.7@855,1775.91 855,1731.91 1033.5,1553.4 1033.5,1331.29 1133.02,1231.78 1226.55,1231.78 U1.77@1226.68,1231.65
IO80: JP1.6 U1.80 | length 960.4
  Top Layer w10: JP1.6@755,1875.91 804,1826.91 804,1757.63 1015.63,1546 1015.63,1323.89 1095.24,1244.27 1095.24,1198.66 1121.31,1172.6 U1.80@1226.68,1172.6
IO83: JP1.5 U1.83 | length 922.9
  Top Layer w10: JP1.5@755,1775.91 758.11,1775.91 997.76,1536.26 997.76,1316.48 1077.37,1236.87 1077.37,1154.65 1118.47,1113.54 U1.83@1226.68,1113.54
IO84: JP1.4 U1.84 | length 1124.7
  Top Layer w10: JP1.4@655,1875.91 705,1825.91 705,1736.91 725.38,1716.53 792.21,1716.53 979.88,1528.86 979.88,1309.08 1059.5,1229.47 1059.5,1147.24 1112.88,1093.86 U1.84@1226.68,1093.86
IO85: JP1.3 U1.85 | length 1064.4
  Top Layer w10: JP1.3@655,1775.91 655,1732.91 689.25,1698.65 784.81,1698.65 962.01,1521.45 962.01,1301.68 1041.62,1222.06 1041.62,1139.84 1107.29,1074.17 U1.85@1226.68,1074.17
IO86: JP1.2 U1.86 | length 1231.6
  Top Layer w10: JP1.2@555,1875.91 605,1825.91 605,1752.91 677.13,1680.78 777.4,1680.78 944.13,1514.05 944.13,1294.27 1023.75,1214.66 1023.75,1132.44 1101.69,1054.49 U1.86@1226.68,1054.49
IO87: JP1.1 U1.87 | length 1155.6
  Top Layer w10: JP1.1@555,1775.91 668,1662.91 770,1662.91 926.26,1506.65 926.26,1286.87 1005.87,1207.26 1005.87,1125.03 1096.1,1034.8 U1.87@1226.68,1034.8
IO98: JP2.39 U1.98 | length 1128.9
  Top Layer w10: JP2.39@555,160.91 704,309.91 850,309.91 933,392.91 933,708.63 1042.64,818.27 U1.98@1226.68,818.27
IO99: JP2.40 U1.99 | length 1204.2
  Top Layer w10: JP2.40@555,60.91 606,111.91 606,181.66 716.37,292.03 859.4,292.03 864.01,296.64 864.01,297.13 950.87,384 950.87,701.22 1048.23,798.58 U1.99@1226.68,798.58
IO100: JP2.37 U1.100 | length 1013.8
  Top Layer w10: JP2.37@655,160.91 768.25,274.16 866.81,274.16 881.88,289.23 881.88,289.73 968.75,376.6 968.75,693.82 1053.83,778.9 U1.100@1226.68,778.9
IO101: JP2.38 U1.101 | length 1091.3
  Top Layer w10: JP2.38@655,60.91 706,111.91 706,186.63 775.66,256.28 874.21,256.28 986.62,368.69 986.62,686.42 1059.98,759.78 1226.11,759.78 U1.101@1226.68,759.21
IO103: JP2.35 U1.103 | length 893.1
  Top Layer w10: JP2.35@755,160.91 755,208.91 784.5,238.41 881.61,238.41 1004.5,361.29 1004.5,637.4 1059,691.91 1131.28,691.91 1159.21,719.84 U1.103@1226.68,719.84
IO104: JP2.36 U1.104 | length 948
  Top Layer w10: JP2.36@755,60.91 806,111.91 806,196.91 829.63,220.54 889.02,220.54 1022.37,353.89 1022.37,630 1066.28,673.91 1138.56,673.91 1164.81,700.16 U1.104@1226.68,700.16
IO105: JP2.33 U1.105 | length 750.1
  Top Layer w10: JP2.33@855,160.91 1040.24,346.15 1040.24,622.59 1073.43,655.78 1145.71,655.78 1170.4,680.47 U1.105@1226.68,680.47 U1.105@1225.77,679.57
IO106: JP2.34 U1.106 | length 825.9
  Top Layer w10: JP2.34@855,60.91 907,112.91 907,187.63 1058.12,338.75 1058.12,615.19 1080.83,637.91 1153.11,637.91 1175.99,660.79 U1.106@1226.68,660.79